# EAGLE board LightBox-Prototype-Shield-v10 (EAGLE 6.4)
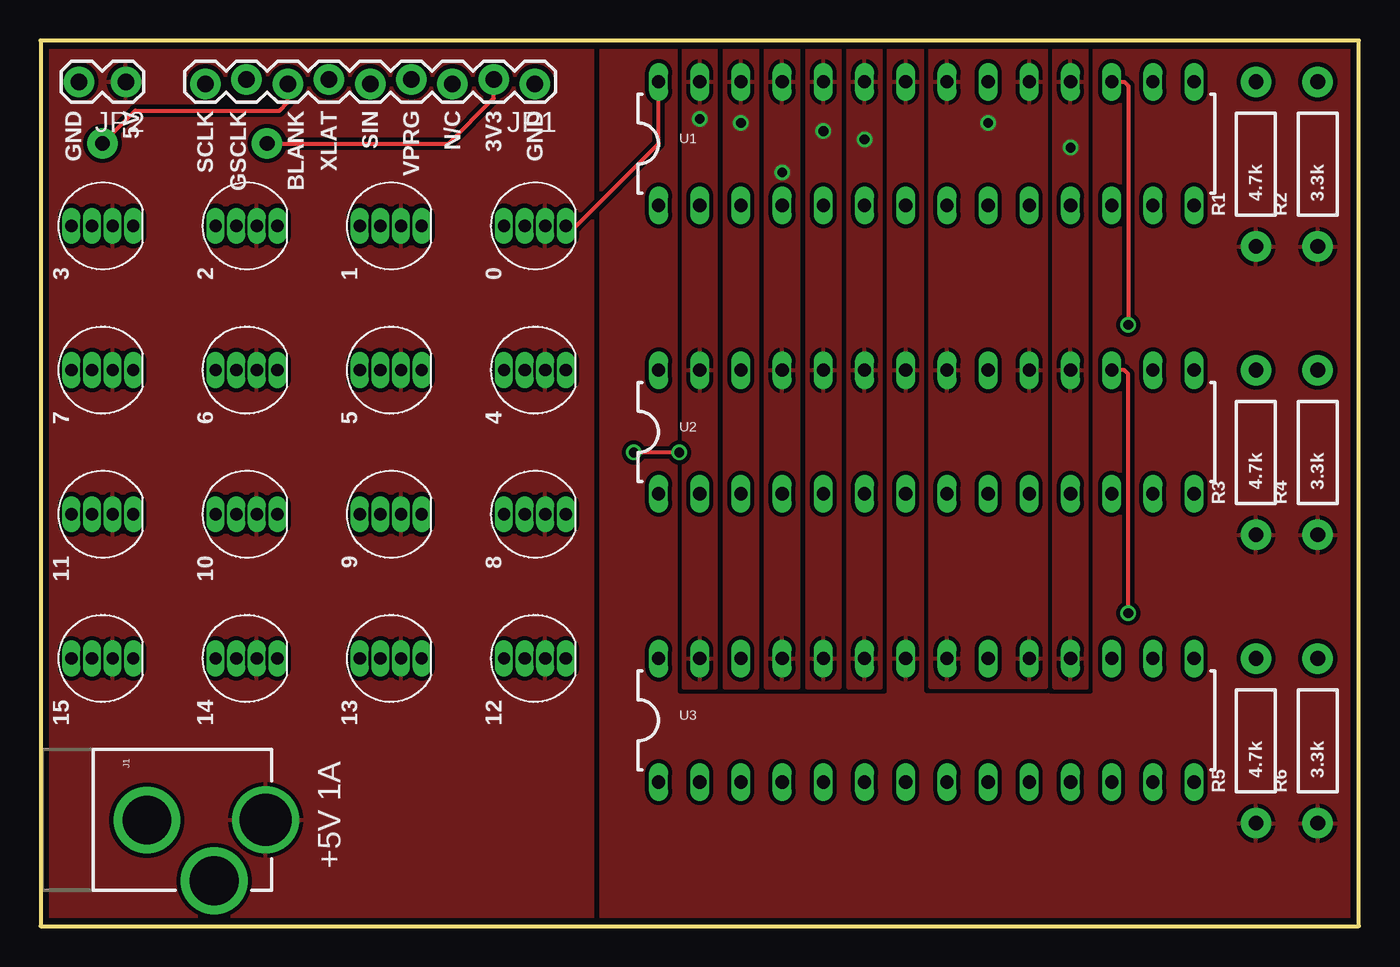
[diagram p0: board, top side]
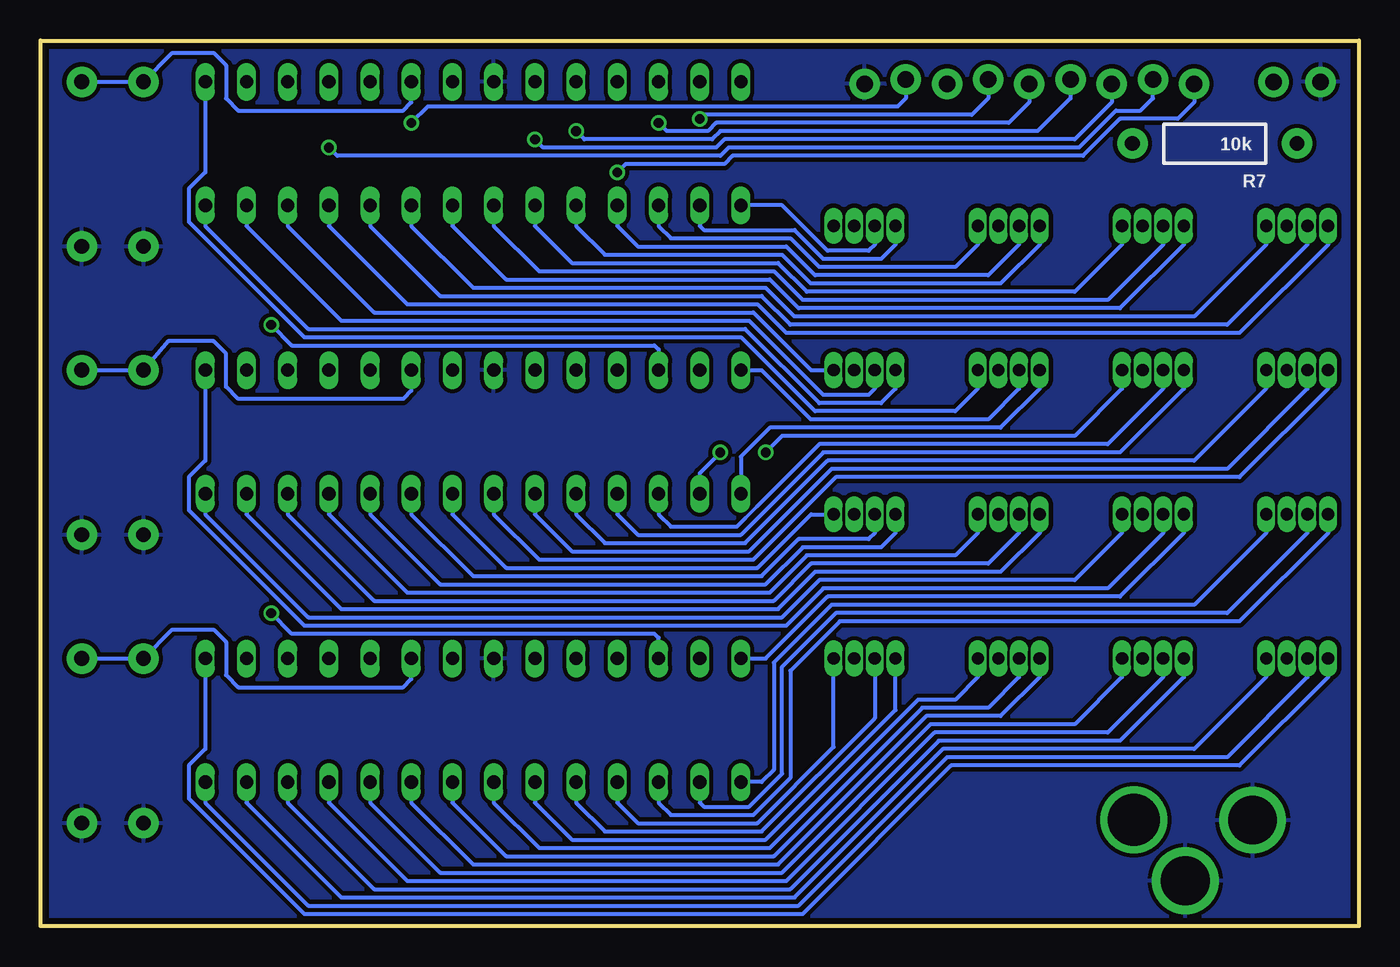
[diagram p1: board, bottom side, seen from below]

Size 81.28 x 54.61 mm. Coordinates in mm from the lower left corner, seen from the top.
Outline: 0,0 81.28,0 81.28,54.61 0,54.61 0,0
Copper layers (1*16): Top 0.0356mm / dielectric 1.5011mm / Bottom 0.0356mm
Design rules "LaenPCBOrder *": minimum track width 6mil, minimum drill 13mil, track to track 6mil, track to pad 6mil, pad to pad 6mil, via to via 6mil, smd to smd 6mil, copper to edge 15mil, drill to drill 6mil, minimum pad ring 7mil, minimum via ring 7mil, stop-mask expansion 4mil, vias tented up to drill 0mil, thermal gap 10mil

## Footprints (pad centres in the part's own frame; a part is rotated, then mirrored left to right if it is on the bottom)
LED-RGB-THRU = drill 0.762 pad 0.889 long: 1 1.905,0; 2 0.635,0; 3 -0.635,0; 4 -1.905,0
POWER_JACK_PTH_LOCK = drill 2.997 pad 4.115: GND 0.025,6.557; GNDBREAK 3.762,10.7 | drill 3.2 pad 4.115: PWR 0,13.878
1X09_LOCK = drill 1.016 pad 1.88: 1 0,0.127; 2 2.54,-0.127; 3 5.08,0.127; 4 7.62,-0.127; 5 10.16,0.127; 6 12.7,-0.127; 7 15.24,0.127; 8 17.78,-0.127; 9 20.32,0.127
1X02_LOCK = drill 1.016 pad 1.88: 1 -0.178,0; 2 2.718,0
AXIAL-0.4 = drill 0.9 pad 1.88: P$1 -5.08,0; P$2 5.08,0
DIL28-3 = drill 0.813 long: 1 -16.51,-3.81; 2 -13.97,-3.81; 3 -11.43,-3.81; 4 -8.89,-3.81; 5 -6.35,-3.81; 6 -3.81,-3.81; 7 -1.27,-3.81; 8 1.27,-3.81; 9 3.81,-3.81; 10 6.35,-3.81; 11 8.89,-3.81; 12 11.43,-3.81; 13 13.97,-3.81; 14 16.51,-3.81; 15 16.51,3.81; 16 13.97,3.81; 17 11.43,3.81; 18 8.89,3.81; 19 6.35,3.81; 20 3.81,3.81; 21 1.27,3.81; 22 -1.27,3.81; 23 -3.81,3.81; 24 -6.35,3.81; 25 -8.89,3.81; 26 -11.43,3.81; 27 -13.97,3.81; 28 -16.51,3.81

## Placement (x,y rotation side)
D1  LED-RGB-CA-THRUDIFFUSE  [LED-RGB-THRU]  30.48,43.18 0 top
D2  LED-RGB-CA-THRUDIFFUSE  [LED-RGB-THRU]  21.59,43.18 0 top
D3  LED-RGB-CA-THRUDIFFUSE  [LED-RGB-THRU]  12.7,43.18 0 top
D4  LED-RGB-CA-THRUDIFFUSE  [LED-RGB-THRU]  3.81,43.18 0 top
D5  LED-RGB-CA-THRUDIFFUSE  [LED-RGB-THRU]  30.48,34.29 0 top
D6  LED-RGB-CA-THRUDIFFUSE  [LED-RGB-THRU]  21.59,34.29 0 top
D7  LED-RGB-CA-THRUDIFFUSE  [LED-RGB-THRU]  12.7,34.29 0 top
D8  LED-RGB-CA-THRUDIFFUSE  [LED-RGB-THRU]  3.81,34.29 0 top
D9  LED-RGB-CA-THRUDIFFUSE  [LED-RGB-THRU]  30.48,25.4 0 top
D10  LED-RGB-CA-THRUDIFFUSE  [LED-RGB-THRU]  21.59,25.4 0 top
D11  LED-RGB-CA-THRUDIFFUSE  [LED-RGB-THRU]  12.7,25.4 0 top
D12  LED-RGB-CA-THRUDIFFUSE  [LED-RGB-THRU]  3.81,25.4 0 top
D13  LED-RGB-CA-THRUDIFFUSE  [LED-RGB-THRU]  30.48,16.51 0 top
D14  LED-RGB-CA-THRUDIFFUSE  [LED-RGB-THRU]  21.59,16.51 0 top
D15  LED-RGB-CA-THRUDIFFUSE  [LED-RGB-THRU]  12.7,16.51 0 top
D16  LED-RGB-CA-THRUDIFFUSE  [LED-RGB-THRU]  3.81,16.51 0 top
J1  POWER_JACKPTH_LOCK  [POWER_JACK_PTH_LOCK]  0,6.56 270 top
JP1  M09LOCK  [1X09_LOCK]  30.48,52.07 180 top
JP2  [1X02_LOCK]  5.08,52.07 180 top
R1  4.7k  [AXIAL-0.4]  74.93,46.99 90 top
R2  3.3k  [AXIAL-0.4]  78.74,46.99 90 top
R3  4.7k  [AXIAL-0.4]  74.93,29.21 90 top
R4  3.3k  [AXIAL-0.4]  78.74,29.21 90 top
R5  4.7k  [AXIAL-0.4]  74.93,11.43 90 top
R6  3.3k  [AXIAL-0.4]  78.74,11.43 90 top
R7  10k  [AXIAL-0.4]  8.89,48.26 180 bottom
U1  TLC5940-NT  [DIL28-3]  54.61,48.26 0 top
U2  TLC5940-NT  [DIL28-3]  54.61,30.48 0 top
U3  TLC5940-NT  [DIL28-3]  54.61,12.7 0 top

## Library data of the parts
D1-D16 = SparkFun-LED; PROD_ID: DIO-10632
J1 JP1 JP2 = SparkFun-Connectors
R1-R7 = SparkFun-Resistors
U1-U3 = SparkFun-DigitalIC

## Nets
+3V3: JP1.2 R7.P$2 U1.19 U1.21 U2.19 U2.21 U3.19 U3.21
CD: JP1.3
GND: J1.GND J1.GNDBREAK JP1.1 JP2.2 R1.P$1 R2.P$1 R3.P$1 R4.P$1 R5.P$1 R6.P$1 U1.22 U2.22 U3.22
N$1: D1.1 U1.28
N$2: D1.3 U1.1
N$3: D1.4 U1.2
N$4: D2.1 U1.3
N$5: D2.3 U1.4
N$6: D2.4 U1.5
N$7: D3.1 U1.6
N$8: D3.3 U1.7
N$9: D3.4 U1.8
N$10: D4.1 U1.9
N$11: D4.3 U1.10
N$12: D4.4 U1.11
N$13: D5.1 U1.12
N$14: D5.3 U1.13
N$15: D5.4 U1.14
N$16: D6.1 U1.15
N$17: D6.3 U2.28
N$18: D6.4 U2.1
N$19: D7.1 U2.2
N$20: D7.3 U2.3
N$21: D7.4 U2.4
N$22: D8.1 U2.5
N$23: D8.3 U2.6
N$24: D8.4 U2.7
N$25: D9.1 U2.8
N$26: D9.3 U2.9
N$27: D9.4 U2.10
N$28: D10.1 U2.11
N$29: D10.3 U2.12
N$30: D11.3 U2.15
N$31: D10.4 U2.13
N$32: D11.1 U2.14
N$33: D11.4 U3.28
N$34: D12.1 U3.1
N$35: D12.3 U3.2
N$36: D12.4 U3.3
N$37: D13.1 U3.4
N$38: D13.3 U3.5
N$39: D13.4 U3.6
N$40: D14.1 U3.7
N$41: D14.3 U3.8
N$42: D14.4 U3.9
N$43: D15.1 U3.10
N$44: D15.3 U3.11
N$45: D15.4 U3.12
N$46: D16.1 U3.13
N$47: D16.3 U3.14
N$48: D16.4 U3.15
N$51: R1.P$2 R2.P$2 U1.20
N$53: R3.P$2 R4.P$2 U2.20
N$54: R5.P$2 R6.P$2 U3.20
N$55: U1.17 U2.26
N$56: U2.17 U3.26
PIN1: JP1.9 U1.25 U2.25 U3.25
PIN2: JP1.8 U1.18 U2.18 U3.18
PIN5: JP1.7 R7.P$1 U1.23 U2.23 U3.23
PIN7: JP1.6 U1.24 U2.24 U3.24
PIN8: JP1.5 U1.26
PIN9: JP1.4 U1.27 U2.27 U3.27
VCC: D1.2 D2.2 D3.2 D4.2 D5.2 D6.2 D7.2 D8.2 D9.2 D10.2 D11.2 D12.2 D13.2 D14.2 D15.2 D16.2 J1.PWR JP2.1

## Tracks (layer width: path | path; a pad name or v marks a point on that pad's centre or on a via)
+3V3  (via drill 0.6)
  Top 0.254: R7.P$2 25.15,48.26 27.94,51.05 JP1.2
  Bottom 0.254: JP1.2 27.94,51.05 28.45,50.55 57.4,50.55 v58.42,49.53
  pour Top (isolate 0.254): 54.86,54.61 61.98,54.61 61.98,14.73 54.86,14.73
GND
  pour Top (isolate 0.254, rank 2): 34.54,0 81.28,0 81.28,54.61 34.54,54.61
  pour Bottom (isolate 0.254, rank 2): 0,54.61 81.28,54.61 81.28,0 0,0
N$1
  Top 0.254: D1.1 33.02,43.18 38.1,48.26 U1.28
N$2
  Bottom 0.254: D1.3 29.84,42.04 30.23,41.66 32.77,41.66 35.56,44.45 U1.1
N$3
  Bottom 0.254: U1.2 40.64,43.18 40.39,42.93 34.8,42.93 33.02,41.15 29.46,41.15 28.57,42.04 D1.4
N$4
  Bottom 0.254: U1.3 43.18,43.18 42.42,42.42 35.05,42.42 33.27,40.64 24.89,40.64 23.5,42.04 D2.1
N$5
  Bottom 0.254: U1.4 45.72,43.18 44.45,41.91 35.31,41.91 33.53,40.13 22.86,40.13 20.95,42.04 D2.3
N$6
  Bottom 0.254: U1.5 48.26,43.18 46.48,41.4 35.56,41.4 33.78,39.62 22.1,39.62 19.68,42.04 D2.4
N$7
  Bottom 0.254: U1.6 50.8,43.18 48.51,40.89 35.81,40.89 34.04,39.12 17.53,39.12 14.61,42.04 D3.1
N$8
  Bottom 0.254: U1.7 53.34,43.18 50.55,40.39 36.07,40.39 34.29,38.61 15.49,38.61 12.06,42.04 D3.3
N$9
  Bottom 0.254: U1.8 55.88,43.18 52.58,39.88 36.32,39.88 34.54,38.1 14.73,38.1 10.79,42.04 D3.4
N$10
  Bottom 0.254: U1.9 58.42,43.18 54.61,39.37 36.58,39.37 34.8,37.59 10.16,37.59 5.71,42.04 D4.1
N$11
  Bottom 0.254: U1.10 60.96,43.18 56.64,38.86 36.83,38.86 35.05,37.08 8.13,37.08 3.17,42.04 D4.3
N$12
  Bottom 0.254: U1.11 63.5,43.18 58.67,38.35 37.08,38.35 35.31,36.58 7.37,36.58 1.91,42.04 D4.4
N$13
  Bottom 0.254: U1.12 66.04,43.18 60.71,37.85 37.34,37.85 33.78,34.29 D5.1
N$14
  Bottom 0.254: U1.13 68.58,43.18 62.74,37.34 37.59,37.34 33.02,32.77 30.23,32.77 29.84,33.15 D5.3
N$15
  Bottom 0.254: U1.14 71.12,43.18 64.77,36.83 37.85,36.83 33.27,32.26 29.46,32.26 28.57,33.15 D5.4
N$16
  Bottom 0.254: U1.15 71.12,46.48 72.14,45.47 72.14,43.43 65.02,36.32 38.1,36.32 33.53,31.75 24.89,31.75 23.5,33.15 D6.1
N$17
  Bottom 0.254: D6.3 20.95,33.15 22.86,31.24 33.78,31.24 36.83,34.29 U2.28
N$18
  Bottom 0.254: D6.4 19.68,33.15 22.1,30.73 36.32,30.73 38.1,28.96 U2.1
N$19  (via drill 0.6)
  Top 0.254: v39.37,29.21 v36.58,29.21
  Bottom 0.254: U2.2 40.64,27.94 v39.37,29.21 | D7.1 14.61,33.15 17.53,30.23 35.56,30.23 v36.58,29.21
N$20
  Bottom 0.203: 37.85,25.15 37.08,25.91
  Bottom 0.254: U2.3 43.18,25.4 42.42,24.64 38.35,24.64 37.85,25.15 | D7.3 12.06,33.15 15.49,29.72 33.27,29.72 37.08,25.91
N$21
  Bottom 0.254: U2.4 45.72,25.4 44.45,24.13 38.1,24.13 33.02,29.21 14.73,29.21 10.79,33.15 D7.4
N$22
  Bottom 0.254: U2.5 48.26,25.4 46.48,23.62 37.85,23.62 32.77,28.7 10.16,28.7 5.71,33.15 D8.1
N$23
  Bottom 0.254: U2.6 50.8,25.4 48.51,23.11 37.59,23.11 32.51,28.19 8.13,28.19 3.17,33.15 D8.3
N$24
  Bottom 0.254: U2.7 53.34,25.4 50.55,22.61 37.34,22.61 32.26,27.69 7.37,27.69 1.91,33.15 D8.4
N$25
  Bottom 0.254: U2.8 55.88,25.4 52.58,22.1 37.08,22.1 33.78,25.4 D9.1
N$26
  Bottom 0.254: U2.9 58.42,25.4 54.61,21.59 36.83,21.59 34.54,23.88 30.23,23.88 29.84,24.26 D9.3
N$27
  Bottom 0.254: U2.10 60.96,25.4 56.64,21.08 36.58,21.08 34.29,23.37 29.46,23.37 28.57,24.26 D9.4
N$28
  Bottom 0.254: U2.11 63.5,25.4 58.67,20.57 36.32,20.57 34.04,22.86 24.89,22.86 23.5,24.26 D10.1
N$29
  Bottom 0.254: U2.12 66.04,25.4 60.71,20.07 36.07,20.07 33.78,22.35 22.86,22.35 20.95,24.26 D10.3
N$30
  Bottom 0.254: U2.15 71.12,28.7 72.14,27.69 72.14,25.65 65.02,18.54 35.31,18.54 33.02,20.83 15.49,20.83 12.06,24.26 D11.3
N$31
  Bottom 0.254: U2.13 68.58,25.4 62.74,19.56 35.81,19.56 33.53,21.84 22.1,21.84 19.68,24.26 D10.4
N$32
  Bottom 0.254: U2.14 71.12,25.4 64.77,19.05 35.56,19.05 33.27,21.34 17.53,21.34 14.61,24.26 D11.1
N$33
  Bottom 0.254: D11.4 10.79,24.26 14.73,20.32 32.77,20.32 36.58,16.51 U3.28
N$34
  Bottom 0.254: D12.1 5.71,24.26 10.16,19.81 32.51,19.81 36.07,16.26 36.07,9.65 36.83,8.89 U3.1
N$35
  Bottom 0.254: U3.2 40.64,7.62 40.39,7.37 37.59,7.37 35.56,9.4 35.56,16 32.26,19.3 8.13,19.3 3.17,24.26 D12.3
N$36
  Bottom 0.254: U3.3 43.18,7.62 42.42,6.86 37.34,6.86 35.05,9.14 35.05,15.75 32,18.8 7.37,18.8 1.91,24.26 D12.4
N$37
  Bottom 0.254: U3.4 45.72,7.62 44.45,6.35 37.08,6.35 32.38,11.05 D13.1
N$38
  Bottom 0.254: U3.5 48.26,7.62 46.48,5.84 36.83,5.84 29.84,12.83 D13.3
N$39
  Bottom 0.254: U3.6 50.8,7.62 48.51,5.33 36.58,5.33 28.57,13.34 D13.4
N$40
  Bottom 0.254: U3.7 53.34,7.62 50.55,4.83 36.32,4.83 27.18,13.97 24.89,13.97 23.5,15.37 D14.1
N$41
  Bottom 0.254: U3.8 55.88,7.62 52.58,4.32 36.07,4.32 26.92,13.46 22.86,13.46 20.95,15.37 D14.3
N$42
  Bottom 0.254: U3.9 58.42,7.62 54.61,3.81 35.81,3.81 26.67,12.95 22.1,12.95 19.68,15.37 D14.4
N$43
  Bottom 0.254: U3.10 60.96,7.62 56.64,3.3 35.56,3.3 26.42,12.45 17.53,12.45 14.61,15.37 D15.1
N$44
  Bottom 0.254: U3.11 63.5,7.62 58.67,2.79 35.31,2.79 26.16,11.94 15.49,11.94 12.06,15.37 D15.3
N$45
  Bottom 0.254: U3.12 66.04,7.62 60.71,2.29 35.05,2.29 25.91,11.43 14.73,11.43 10.79,15.37 D15.4
N$46
  Bottom 0.254: U3.13 68.58,7.62 62.74,1.78 34.8,1.78 25.65,10.92 10.16,10.92 5.71,15.37 D16.1
N$47
  Bottom 0.254: U3.14 71.12,7.62 64.77,1.27 34.54,1.27 25.4,10.41 8.13,10.41 3.17,15.37 D16.3
N$48
  Bottom 0.254: U3.15 71.12,10.92 72.14,9.91 72.14,7.87 65.02,0.76 34.29,0.76 25.15,9.91 7.37,9.91 1.91,15.37 D16.4
N$51
  Bottom 0.254: R2.P$2 R1.P$2 73.15,53.85 70.61,53.85 69.85,53.09 69.85,51.05 69.09,50.29 58.93,50.29 58.42,50.8 U1.20
N$53
  Bottom 0.254: R4.P$2 R3.P$2 73.41,36.07 70.61,36.07 69.85,35.31 69.85,33.27 69.09,32.51 58.93,32.51 58.42,33.02 U2.20
N$54
  Bottom 0.254: R6.P$2 R5.P$2 73.15,18.29 70.61,18.29 69.85,17.53 69.85,15.49 69.09,14.73 58.93,14.73 58.42,15.24 U3.20
N$55  (via drill 0.6)
  Top 0.254: U1.17 66.8,52.07 67.06,51.82 v67.06,37.08
  Bottom 0.254: v67.06,37.08 65.79,35.81 43.43,35.81 43.18,35.56 U2.26
N$56  (via drill 0.6)
  Top 0.254: v67.06,19.3 67.06,34.04 66.8,34.29 U2.17
  Bottom 0.254: U3.26 43.18,17.78 43.43,18.03 65.79,18.03 v67.06,19.3
PIN1  (via drill 0.6)
  Bottom 0.254: JP1.9 10.16,50.8 11.18,49.78 14.73,49.78 17.02,47.5 38.61,47.5 39.12,46.99 45.21,46.99 v45.72,46.48
  pour Top (isolate 0.254): 44.7,14.73 46.74,14.73 46.74,54.61 44.7,54.61
PIN2  (via drill 0.6)
  Bottom 0.254: v63.5,48.01 62.99,47.5 39.37,47.5 38.86,48.01 17.27,48.01 14.99,50.29 13.46,50.29 12.7,51.05 JP1.8
  pour Top (isolate 0.254): 62.48,14.73 64.52,14.73 64.52,54.61 62.48,54.61
PIN5  (via drill 0.6)
  Top 0.254: R7.P$1 5.84,50.29 14.73,50.29 15.24,50.8 JP1.7
  Bottom 0.254: JP1.7 15.24,50.8 17.53,48.51 39.12,48.51 39.62,48.01 50.29,48.01 v50.8,48.51
  pour Top (isolate 0.254): 49.78,14.73 51.82,14.73 51.82,54.61 49.78,54.61
PIN7  (via drill 0.6)
  Bottom 0.254: JP1.6 17.78,51.05 19.81,49.02 39.37,49.02 39.88,48.51 47.75,48.51 v48.26,49.02
  pour Top (isolate 0.254): 47.24,14.73 49.28,14.73 49.28,54.61 47.24,54.61
PIN8  (via drill 0.6)
  Bottom 0.254: JP1.5 20.32,50.8 21.59,49.53 39.62,49.53 40.13,49.02 42.67,49.02 v43.18,49.53
  pour Top (isolate 0.254): 42.16,14.73 44.2,14.73 44.2,54.61 42.16,54.61
PIN9  (via drill 0.6)
  Bottom 0.254: JP1.4 22.86,51.05 23.88,50.04 40.39,50.04 v40.64,49.78
  pour Top (isolate 0.254): 39.62,14.73 41.66,14.73 41.66,54.61 39.62,54.61
VCC
  pour Top (isolate 0.254, rank 2): 34.04,0 34.04,54.61 0,54.61 0,0

## Text on the board
tPlace: GND | 5V | SCLK | GSCLK | BLANK | XLAT | SIN | VPRG | N/C | 3V3 | GND | 3 | 2 | 1 | 0 | 7 | 6 | 5 | 4 | 11 | 10 | 9 | 8 | 15 | 14 | 13 | 12 | +5V 1A